# Altium PCB PCB1.PcbDoc
Units mm, origin at the board's own origin, x right, y up, seen from the top; angles counter-clockwise.
Board outline 40 x 49.4 mm, 2 copper layers (Top Layer, Bottom Layer); 14 components, 7 nets, 36 pads, 14 vias.
Unrouted connection lines stored in the file: 1.
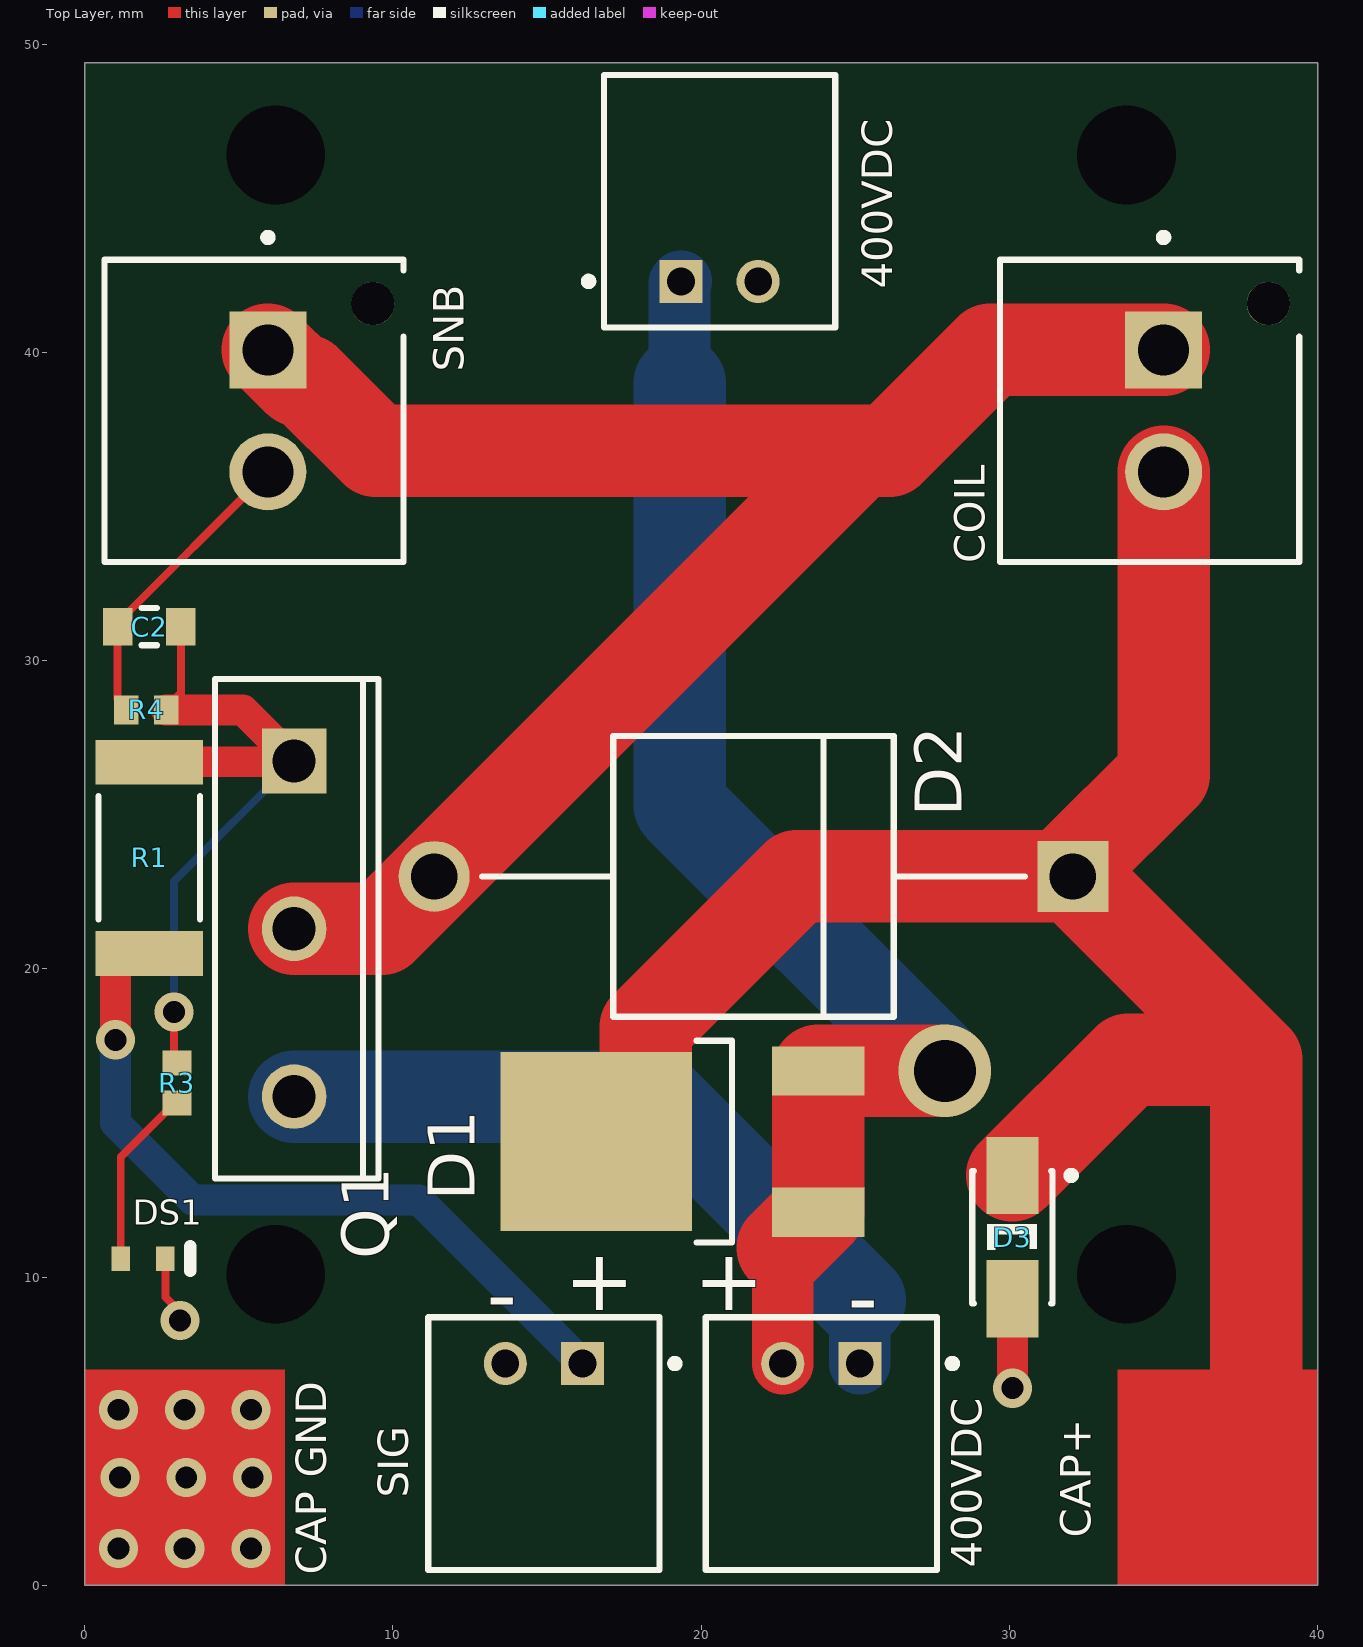
[diagram p0: Top Layer view]
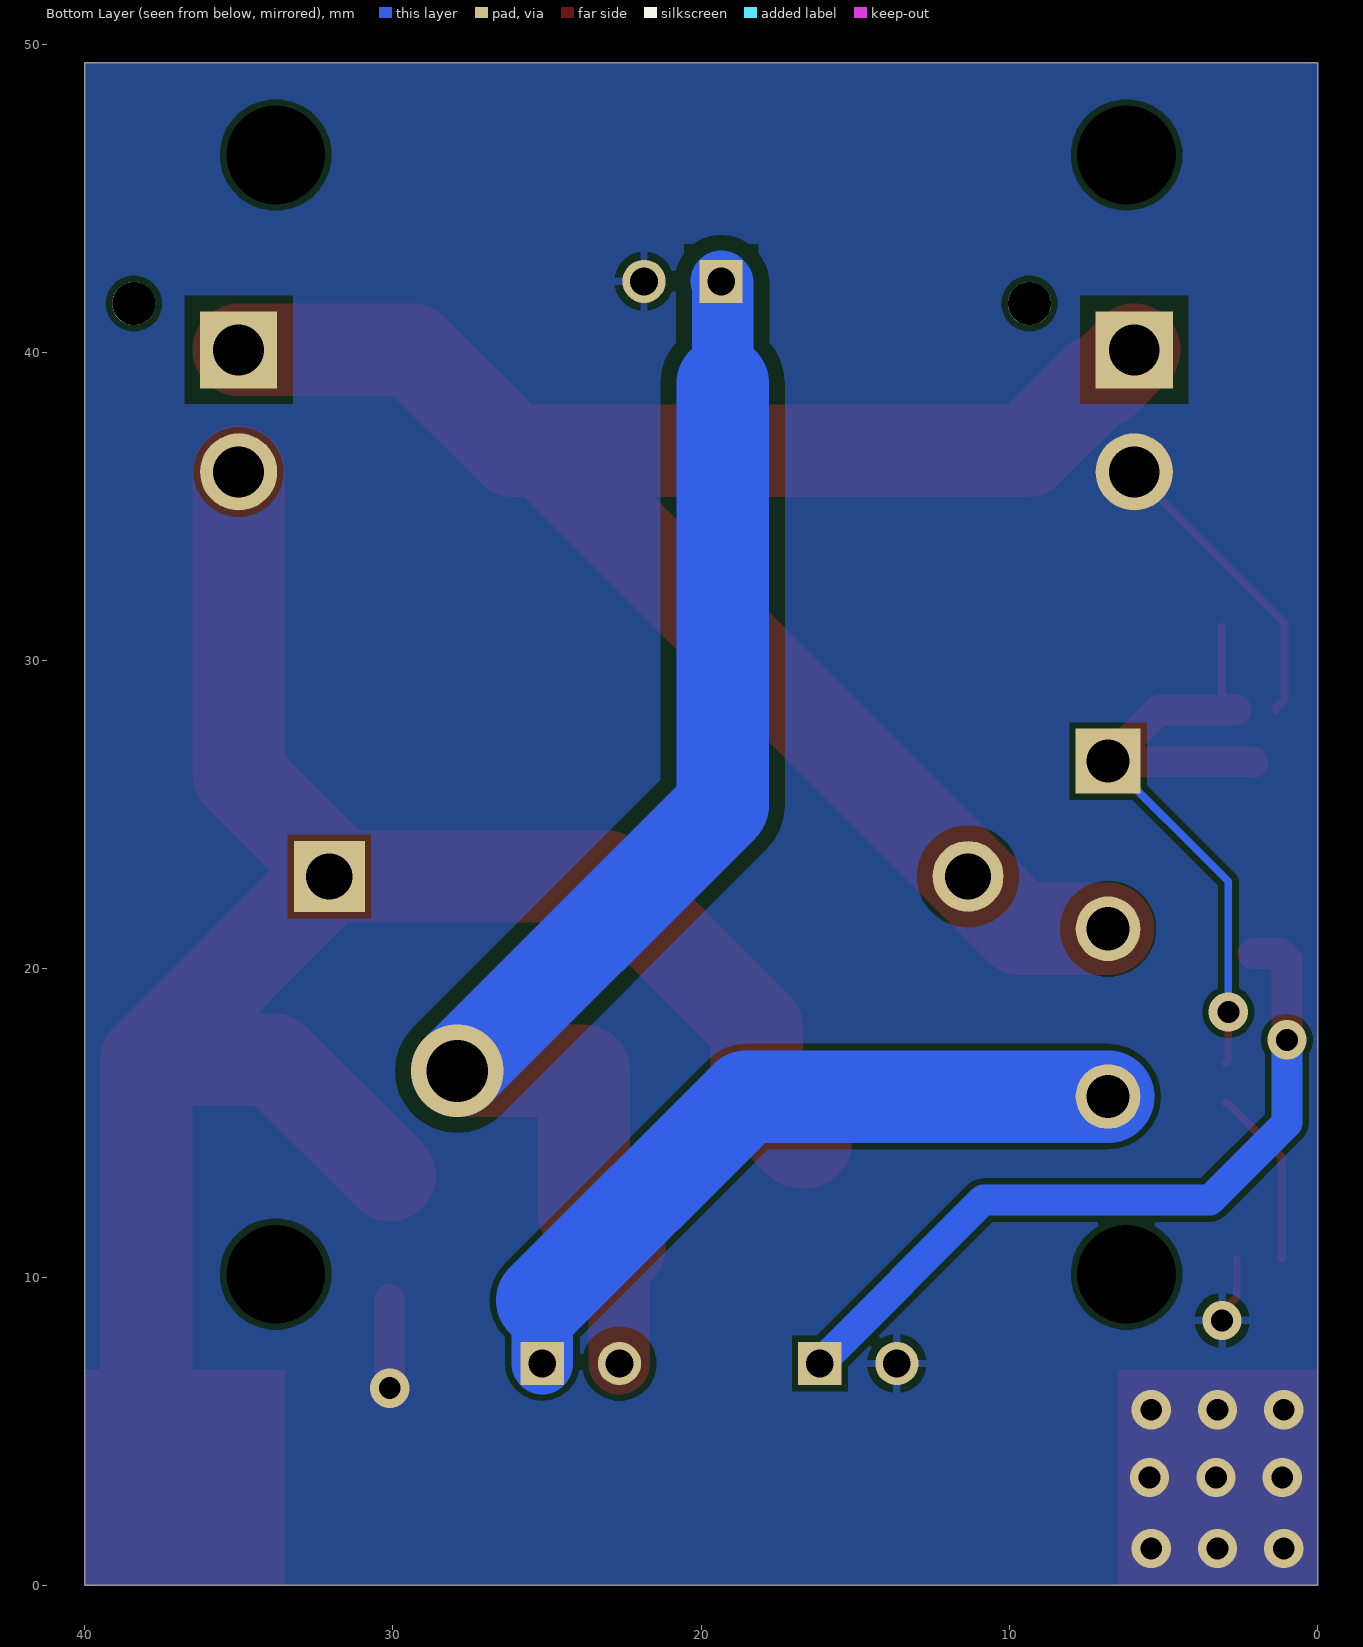
[diagram p1: Bottom Layer view, seen from below]
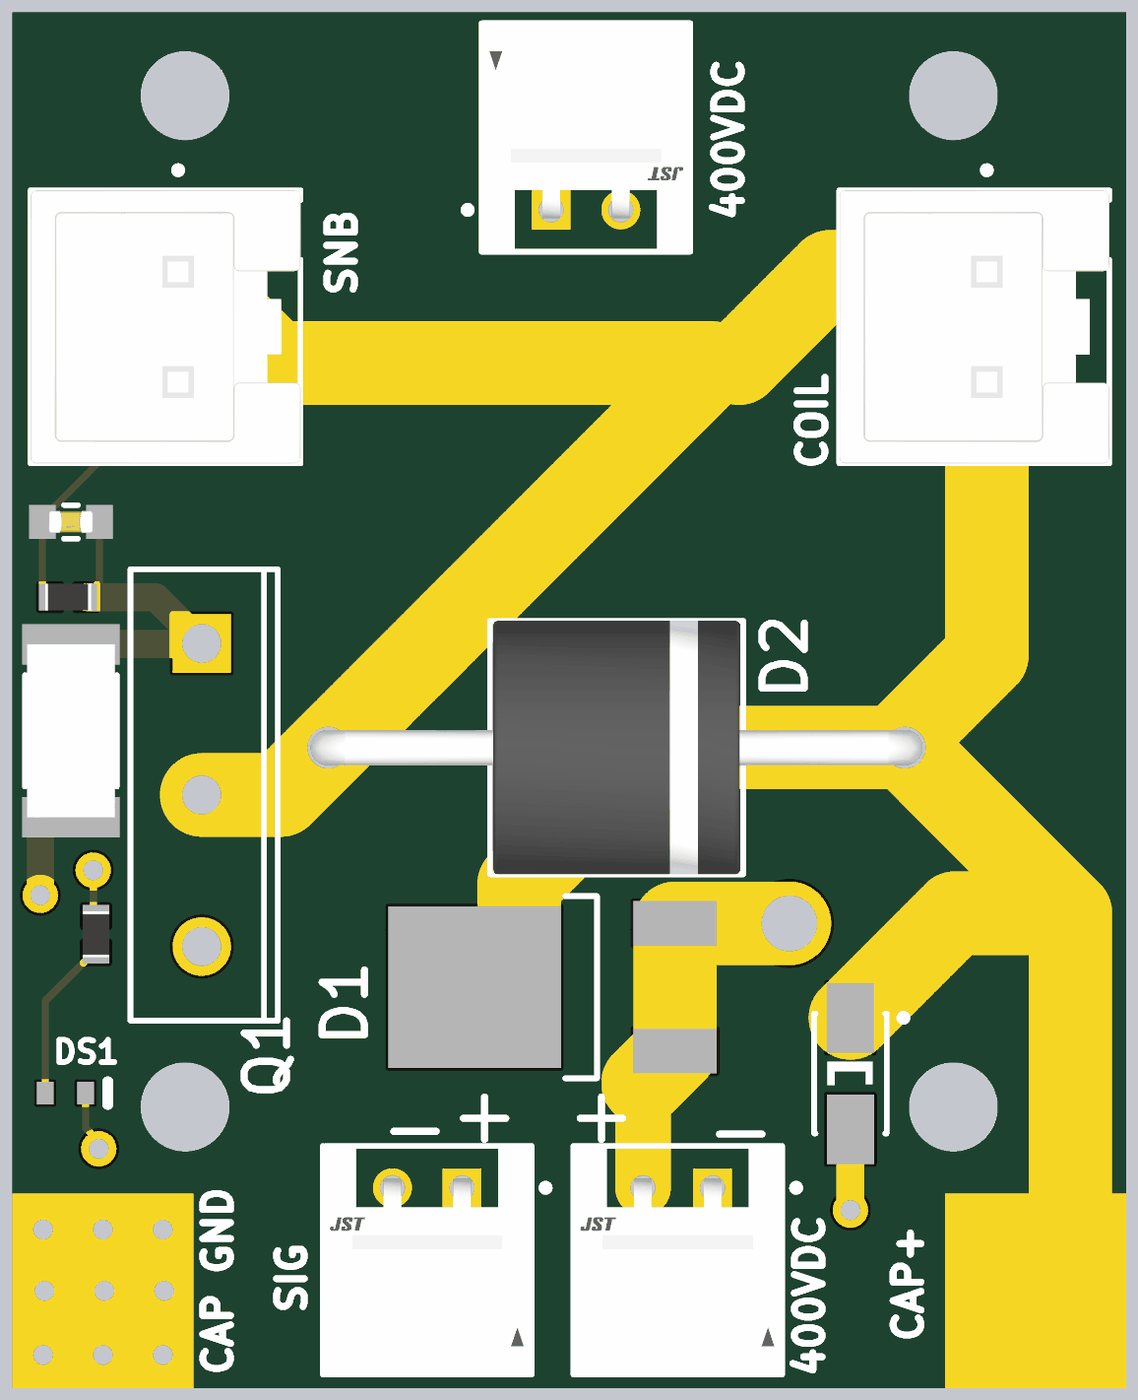
[diagram p2: 3D render of the assembled board from above, using the file's embedded part models]

## Layer stack, top to bottom
Top Solder: solder mask 0.0102, Solder Resist, Dk 3.5
Top Layer: signal copper 0.0356
Dielectric 1: dielectric 0.32, FR-4, Dk 4.8
Bottom Layer: signal copper 0.0356
Bottom Solder: solder mask 0.0102, Solder Resist, Dk 3.5

## Board outline
0,0 40,0 40,49.4 0,49.4

## Design rules (kind name [scope] priority, off if disabled: settings)
Clearance Clearance_1 [InNet('400VDC') or InNet('Collector1')] p1: gap=0.2 ignorepadtopadclearanceinfootprint=FALSE except(0: Arc-Hole Track-Hole SMDPad-Hole THPad-Hole Via-Hole Fill-Hole Poly-Hole Region-Hole Text-Hole; 0.5: Track-Poly THPad-Poly)
Clearance [All] p2: gap=0.2 ignorepadtopadclearanceinfootprint=FALSE except(0: Arc-Hole Track-Hole SMDPad-Hole THPad-Hole Via-Hole Fill-Hole Poly-Hole Region-Hole Text-Hole)
Height [All] p1: minheight=0 maxheight=100 prefheight=12.7
HoleSize [All] p1: absolutevalues=TRUE maxlimit=10 minlimit=0.025 maxpercent=80.000 minpercent=20.000
MinimumSolderMaskSliver [All] p1: minsoldermaskwidth=0.2
PlaneClearance [All] p1: clearance=1
PolygonConnect [All] p1: connectstyle=Relief reliefconductorwidth=0.254 reliefentries=4 polygonreliefangle="90 Angle" airgapwidth=0.254
RoutingVias [All] p1: holewidth=0.711 width=1.27 viastyle="Through Hole" minholewidth=0.711 minwidth=1.27 maxholewidth=0.711 maxwidth=1.27
SilkToSolderMaskClearance [IsPad] p1: minsilkscreentomaskgap=0.2 clearancetoexposedcopper=TRUE
SolderMaskExpansion [All] p1: expansion=0.102 istentingtop=FALSE
Width [All] p1: maxlimit=10 minlimit=0.254 preferedwidth=0.254 minimp=50.000000 maximp=50.000000 favimp=50.000000
25 further rules are at their usual default settings.

## Components (designator, comment, footprint, x,y, rotation, side; value= is the part's Value field where it differs from the comment)
400VDC "(D)S2B-EH (LF)(SN)" FP-D_S2B-EH_LF_SN-MFG 20.6,44.9 r0 top (schematic designator J5)
400VDC "(D)S2B-EH (LF)(SN)" FP-D_S2B-EH_LF_SN-MFG 23.9,4.6 r180 top (schematic designator J2)
C2 "CGA3E2X7R1H104K080AA" FP-CGA3E-0_3-0_1-IPC_A 2.1,31.1 r180 top
COIL "B2P-VH-FB-B(LF)(SN)" FP-B2P-VH-FB-B_LF_SN-MFG 34.55,38.1 r90 top (schematic designator J3)
D1 "MURHD560T4G" ONSC-DPAK-3-369C-01_V 19.4,14.4 r180 top
D2 "GI756-E3/54" FP-P600-MFG 21.7,23 r180 top
D3 "R" DIOD-S1M-13-F-SMA-2_V 30.1,11.3 r90 top
DS1 "Coil 3" VISH-TLMX1100_V 1.9,10.6 r0 top
Q1 "SCR" INF-PG-TO247-3-44_A 6.8,21.3 r0 top
R1 "1k" FP-CRCW2512-e3-MFG 2.1,23.6 r90 top
R3 "400" RESC1609X50X30NL8T20 3,16.3 r90 top
R4 "10k" RESC1609X50X30NL8T20 2,28.4 r0 top
SIG "(D)S2B-EH (LF)(SN)" FP-D_S2B-EH_LF_SN-MFG 14.9,4.6 r180 top (schematic designator J4)
SNB "B2P-VH-FB-B(LF)(SN)" FP-B2P-VH-FB-B_LF_SN-MFG 5.5,38.1 r90 top (schematic designator J1)

## Footprints (in the part's own frame and the unit in brackets; to place one, negate y for a bottom-side part, rotate by r counter-clockwise, add the part's x,y. Pads: shape width x height; smd on the part's side, far side on the other; paste and mask are expansions set on the pad)
DIOD-S1M-13-F-SMA-2_V [mm] "SMD, 2-Leads, Body 4.3x2.605mm, Height 2.3mm"
  rect 2.5x1.7 smd: 1(-2,0) 2(2,0)
  silkscreen extent -2.15,-2.03 2.15,1.3, body extent -2.15,-1.3 2.15,1.3, height 2.3
FP-B2P-VH-FB-B_LF_SN-MFG [mm]
  rect 2.5x2.5 hole 1.65 paste-2539.97 mask+0: 1(1.98,-0.45)
  round 2.5 hole 1.65 paste-2539.97 mask+0: 2(-1.98,-0.45)
  round 1.4 hole 1.4 unplated paste-2539.97 mask+0: ""(3.48,-3.85)
  silkscreen extent -4.9,-4.85 5.75,4.85, body extent -5,-4.95 5,4.95, height 0.25
FP-CGA3E-0_3-0_1-IPC_A [mm]
  rect 0.956x1.206 smd paste+0 mask+0: 1(-1.025,0) 2(1.025,0)
  silkscreen extent -0.25,-0.6 0.25,0.6, body extent -2,-1.1 2,1.1, height 0.25
FP-CRCW2512-e3-MFG [mm]
  rect 1.45x3.5 smd paste+0 mask+0: 1(-3.1,0) 2(3.1,0)
  silkscreen extent -2,-1.65 2,1.65, body extent -3.93,-1.85 3.93,1.85, height 0.25
FP-D_S2B-EH_LF_SN-MFG [mm]
  rect 1.4x1.4 hole 0.9 paste-2539.97 mask+0: 1(-1.25,-2.6)
  round 1.4 hole 0.9 paste-2539.97 mask+0: 2(1.25,-2.6)
  silkscreen extent -4.37,-4.1 3.75,4.1, body extent -3.85,-4.2 3.85,4.2, height 0.25
FP-P600-MFG [mm]
  rect 2.3x2.3 hole 1.5 paste-2539.97 mask+0: 1(-10.358,0)
  round 2.3 hole 1.5 paste-2539.97 mask+0: 2(10.358,0)
  silkscreen extent -8.81,-4.55 8.81,4.55, body extent -11.61,-4.65 11.61,4.65, height 0.25
INF-PG-TO247-3-44_A [mm] "FM, 3-Leads, Body 15.915x5.02mm, Pitch 5.44mm"
  rect 2.1x2.1 hole 1.4: 1(0,5.44)
  round 2.1 hole 1.4: 2(0,0) 3(0,-5.44)
  silkscreen extent -2.57,-8.1 2.74,8.1, body extent -2.54,-8.08 2.71,8.08, height 25.57
ONSC-DPAK-3-369C-01_V [mm] "DPAK, 3-Leads, Body 6.54x6.095mm, Pitch 2.29mm"
  rect 3x1.6 smd: 1(-4.4,2.29) 3(-4.4,-2.29)
  rect 6.2x5.8 smd: 4(2.8,0)
  silkscreen extent -1.6,-3.27 -0.45,3.27, body extent -1.6,-3.27 4.49,3.27, height 2.38
RESC1609X50X30NL8T20 [mm] "Chip Resistor, 2-Leads, Body 1.65x0.95mm, IPC Medium Density"
  rect 0.8x0.95 smd: 1(-0.65,0) 2(0.65,0)
  body extent -0.82,-0.48 0.82,0.48, height 0.5
VISH-TLMX1100_V [mm] "SMD, 2-Leads, Body 1.6x0.8mm"
  rect 0.6x0.8 smd: 1(-0.725,0) 2(0.725,0)
  silkscreen extent 1.53,-0.4 1.53,0.4, body extent -0.8,-0.4 0.8,0.4, height 0.65

## Part data
400VDC 400VDC SIG: library part CMP-17439-000238-1, "CONN HEADER R/A 2POS 2.5MM"
C2: library part CMP-2000-07546-2, "Cap Ceramic 100nF 50V X7R 10% Pad SMD 0603 +125°C Automotive T/R", Capacitance=100nF, Case Code (Imperial)=0603, Case Code (Metric)=1608, Dielectric=X7R, Max Operating Temperature=125°C, Min Operating Temperature=-55°C, Package Quantity=1, Ratings=AEC-Q200, Tolerance=10%, Voltage=50V, Case/Package=0603, Composition=Ceramic, Depth=0.8mm, Height=0.8mm, Lead Free="Lead Free", Length=1.6mm, Mount="Surface Mount", Packaging="Tape and Reel", Radiation Hardening=No, REACH SVHC="No SVHC", Termination=SMD/SMT, Thickness=0.035inch, Voltage Rating=50V, Voltage Rating (DC)=50V, Weight=7.1E-05oz, Width=0.8mm
COIL SNB: library part CMP-17439-000031-1, "CONN HEADER VERT 2POS 3.96MM", Color=Natural, Package Quantity=250, Connector Type="Male Pin", Contact Plating=Tin, Contact Type="Male Pin", Fastening Type=Ramp, Lead Free="Lead Free", Mount="Through Hole", Number of Positions=2, Number of Rows=1, Packaging=Bulk, Pitch=0.156inch, Series=VH, Termination=Solder
D1: library part CMP-0902-00243-1, "Power Rectifier, 3-Pin DPAK, Pb-Free, Tape and Reel", Manufacturer="On Semiconductor", ComponentLink1Description="Manufacturer URL", ComponentLink1URL=http://www.onsemi.com/, ComponentLink2Description=Datasheet, ComponentLink2URL=http://www.onsemi.cn/pub_link/Collateral/MURHD560-D.PDF, ComponentLink3Description="Package Specification", ComponentLink3URL=http://www.onsemi.cn/pub_link/Collateral/369C.PDF, DatasheetVersion="Rev. 8", IFSM Max (A)=50, Mounting Technology="Surface Mount", PackageDescription="3-Pin Flange Mount, Body 6.54 x 6.095 mm, Pitch 2.29 mm", PackageReference=DPAK-3-369C-01, PackageVersion="Rev. E, 02/2014", Packing="Tape and Reel", PartNumber=MURHD560T4G, RoHS=TRUE, Type=Ultrafast, VRRM Max (V)=600
D2: library part CMP-02540-000099-1, "DIODE GEN PURP 600V 6A P600", Average Rectified Current=6A, Capacitance=150pF, Case/Package=P, Current=400A, Forward Voltage=1.25V, Max Operating Temperature=150°C, Max Repetitive Reverse Voltage (Vrrm)=600V, Max Reverse Current=5uA, Min Operating Temperature=-50°C, Package Quantity=1, Voltage=1.2kV, Diameter=9.1mm, Diode Type=RECTIFIER, Element Configuration=Single, Forward Current=6A, Height=9.1mm, Lead Free="Lead Free", Length=0.358inch, Max Forward Surge Current (Ifsm)=400A, Max Reverse Voltage (DC)=600V, Max Surge Current=400A, Mount="Through Hole", Number of Pins=2, Output Current=6A, Packaging="Tape and Reel", Peak Non-Repetitive Surge Current=400A, Polarity=Standard, Radiation Hardening=No, Recovery Time=2500ns, Reverse Recovery Time=2500ns, Reverse Voltage=600V, RoHS Compliant=Yes, Width=9.1mm
D3: library part CMP-0639-00001-1, "Surface Mount Glass Passivated Rectifier, 1000V, 1 A, -65 to 125 degC, 2-Pin SMA Package, RoHS, Tape and Reel", Forward Voltage Drop VF (V)=1.1, Manufacturer="Diodes Inc", Maximum Average Rectified Current IO (A)=1, Maximum Peak Forward Surge Current IFSM (A)=30, Maximum Reverse Current IR (uA)=5, Operating Temperature Range="-65 to 150 degC", PartNumber=S1M-13-F, Peak Repetitive Reverse Voltage VRRM (V)=1000, Total Capacitance CT (pF)=10, ComponentLink1Description="Manufacturer URL", ComponentLink1URL=http://www.diodes.com/, ComponentLink2Description=Datasheet, ComponentLink2URL=http://diodes.com/datasheets/ds16003.pdf, ComponentLink3Description="Package Specification", ComponentLink3URL=http://diodes.com/datasheets/ds16003.pdf, DatasheetVersion="Rev. 22 - 2", Mounting Technology="Surface Mount", PackageDescription="2-Pin SMD, Body 4.3 x 2.605 mm, Height 2.3 mm", PackageReference=S1M-13-F-SMA-2, PackageVersion="Rev. 22 - 2", Packing="Tape and Reel", RoHS=TRUE
DS1: library part CMP-1666-00027-1, "LED, RED, 2.1 V, -40 to 100 degC, 2-Pin SMD (0603), RoHS, Tape and Reel", Capacitance="12 pF", Case Code (Imperial)=0603, Case Code (Metric)=1608, Max Operating Temperature=125degC, Min Operating Temperature=-55degC, Package Quantity=4000, Resistance="100000000000 Ohm", Tolerance=5%, Type (Capacitors)=C0G, Voltage Rating="50 V", Case/Package=0603, ComponentLink1Description="Manufacturer URL", ComponentLink1URL=http://www.vishay.com/, ComponentLink2Description=Datasheet, ComponentLink2URL=http://www.vishay.com/docs/83173/tlmb1100.pdf, DatasheetVersion="Rev. 2.7, 03/2016", Height="0.8 mm", Length="1.6 mm", Mount="Surface Mount", PackageDescription="2-Pin Surface Mount Device, Body 1.6 x 0.8 mm", PackageReference=TLMX1100, Packaging="Tape and Reel", Pins=2, Radiation Hardening=No, REACH SVHC="No SVHC", RoHSCompliant=True, Voltage Rating (DC)="50 V", Width="0.8 mm"
Q1: library part CMP-1168-00055-1, "High Speed IGBT in NPT-Technology, PG-TO247-3-44, Tube, Green", Manufacturer=Infineon, PartNumber=SGW30N60HS, Switching Frequency="HighSpeed 30-100 kHz", ComponentLink1Description="Manufacturer URL", ComponentLink1URL=http://www.infineon.com/, ComponentLink2Description=Datasheet, ComponentLink2URL=http://www.infineon.com/dgdl/SGP_W30N60HS_Rev2_4G.pdf?folderId=db3a304412b407950112b408e8c90004&fileId=db3a304412b407950112b427ac823c95, ComponentLink3Description="Package Specification", ComponentLink3URL=http://www.infineon.com/dgdl/IDW10S120_Rev+2.pdf?folderId=db3a304314dca38901151224afae0c96&fileId=db3a304336724dc40136789691a04aa5, DatasheetVersion="Rev. 2.4", Green=TRUE, Halogen-free=FALSE, IC(max) @ 25 degC="41 A", IC(max) @ 100 degC="30 A", Mounting Technology="Through Hole", PackageDescription="3-Pin Plastic (Green) Transistor Single Outline Package, Body 15.915 x 20.95 mm, Pitch 5.44 mm", PackageReference=PG-TO247-3-44_A, PackageVersion="Rev. 05, 07/2010", Packing=Tube, RevisionNote="Lost Devices pt2", VCE (max)="600 V", VCE(sat) (typ)="2.8 V"
R1: library part CMP-02407-004199-1, "RES Thick Film, 100kΩ, 1%, 1W, 100ppm/°C, 2512", Case Code (Imperial)=2512, Case Code (Metric)=6432, Max Operating Temperature=155°C, Max Power Dissipation=1W, Min Operating Temperature=-55°C, Package Quantity=2000, Resistance=100kR, Temperature Coefficient=100ppm/°C, Tolerance=1%, Voltage Rating=500V, Case/Package=2512, Composition="Thick Film", Contact Plating=Tin, Depth=3.15mm, Features="Automotive AEC-Q200", Height=0.6mm, Lead Free="Lead Free", Length=6.3mm, Military Standard=Not, Number of Pins=2, Number of Terminations=2, Packaging="Tape and Reel", Power Rating=1W, Radiation Hardening=No, Termination=SMD/SMT, Voltage Rating (DC)=500V, Weight=0.001429oz, Width=3.15mm
R3 R4: library part CMP-1666-00005-4, "Chip Resistor, 10 KOhm, +/- 1%, 100 mW, -55 to 155 degC, 0603 (1608 Metric), RoHS, Tape and Reel", Manufacturer="Vishay Semiconductor", Max Operating Temperature="155 degC", Min Operating Temperature="-55 degC", Package Quantity=5000, Voltage Rating="75 V", ComponentLink1Description="Manufacturer URL", ComponentLink1URL=http://www.vishay.com/, ComponentLink2Description=Datasheet, ComponentLink2URL=https://datasheet.ciiva.com/11809/0900766b80d98afc-11809037.pdf, DatasheetVersion=06/2012, Height="0.45 mm", Length="1.55 mm", Mounting Technology="Surface Mount", PackageDescription="2-Pin Surface Mount Device, Body 1.575 x 0.85 mm", PackageReference=0603, Packaging="Tape and Reel", REACH SVHC=Unknown, RoHSCompliant=true

## Free pads (board coordinates)
  round 1.524 hole 3.2 unplated: 30(6.2,10.1) 30(6.2,46.4) 30(33.8,46.4) 31(33.8,10.1)

## Via types
v1: diameter 1.27, hole 0.711, Top Layer to Bottom Layer, 13 vias
v2: diameter 3, hole 2, Top Layer to Bottom Layer, 1 vias

## Nets (pads, with @x,y where several pads share a name; then routed paths per layer and width w, separated by ;. In a path a pad name is that pad's centre, name@x,y a point inside that pad or via, vN(x,y) a via of type N, cw(c..) or ccw(c..) an arc to the next point about the centre after c; other vN are vias at no path point)
400VDC: 400VDC.1@19.35,42.3 400VDC.2@22.65,7.2 D1.1 D1.3 | length 44.2
  Top Layer w0.254: D1.1 D1.1@24.473,12.783
  Top Layer w2: 400VDC.2@22.65,7.2 22.65,10.96
  Top Layer w3: 22.65,10.96 D1.1 D1.3 v2(27.91,16.69)
  Bottom Layer w2: 19.3,39 19.3,42.25 400VDC.1@19.35,42.3
  Bottom Layer w3: 19.3,39 19.3,25.3 v2(27.91,16.69)
C1+: COIL.2 D1.4 D2.1 D3.2 | length 66.3
  Top Layer w3: D1.4 16.8,14.4 18.2,15.8 18.2,18.1 23.1,23 D2.1 ; D3.2 33.858,17.058 38,17.058 ; COIL.2 35,26.3 32.058,23.358 D2.1 ; 36.75,3.85 38,5.1 38,17.058 ; D2.1 38,17.058
Collector1: COIL.1 D2.2 Q1.2 SNB.1 | length 56.5
  Top Layer w3: SNB.1 6.96,39.07 7.172,39.07 9.442,36.8 25.142,36.8 ; Q1.2 9.642,21.3 D2.2 25.142,36.8 ; COIL.1 29.38,40.08 26.1,36.8 25.142,36.8
GND: 400VDC.1@25.15,7.2 400VDC.2@21.85,42.3 C2.2 D3.1 DS1.2 Q1.3 R4.1 SIG.2 SNB.2 | length 38.1
  Top Layer w0.254: R4.1 1.35,28.475 1.075,28.75 C2.2 1.075,31.225 5.95,36.1 SNB.2 ; DS1.2 2.625,9.35 3.1,8.875 v1(3.1,8.6)
  Top Layer w1: v1(30.1,6.4) D3.1
  Bottom Layer w2: 400VDC.1@25.15,7.2 25.15,9.25
  Bottom Layer w3: Q1.3 18.54,15.86 25.15,9.25
  other v1: 1.1,1.2 3.25,1.2 5.4,1.2 1.15,3.5 3.3,3.5 5.45,3.5 1.1,5.7 3.25,5.7 5.4,5.7
NetC2_1: C2.1 Q1.1 R1.2 R3.2 R4.2 | length 23.9
  Top Layer w0.254: R4.2 2.65,28.475 3.125,28.95 C2.1 ; v1(2.9,18.6) 2.9,17.05 R3.2
  Top Layer w1: R1.2 2.12,26.72 6.78,26.72 Q1.1 5.14,28.4 R4.2
  Bottom Layer w0.254: v1(2.9,18.6) 2.9,22.84 Q1.1
NetDS1_1: DS1.1 R3.1 | length 5.8
  Top Layer w0.254: DS1.1 1.175,13.9 2.925,15.65 R3.1
Sig1: R1.1 SIG.1 | length 24.8
  Top Layer w1: v1(1,17.7) 1,20.275 1.225,20.5 R1.1
  Bottom Layer w1: v1(1,17.7) 1,15 3.5,12.5 10.85,12.5 SIG.1
pads on no net: COIL. SNB.

## Polygon pours and split planes (outlines as drawn)
GND on Bottom Layer "GND_L02_P000" (solid, pour order 0): 0,0 40,0 40,49.4 0,49.4

## Other copper
Top Layer:
  rectangle net GND: 0,0 6.5,7
  rectangle net C1+: 33.5,0 40,7

## Silkscreen, mask and mechanical layers (free items; w line width, h text height)
Top Overlay:
  text "+" at 15.554,8.921 h2
  text "+" at 19.754,8.921 h2
  text "-" at 13.054,8.454 h2
  text "-" at 24.754,8.354 h2
  text "CAP+" at 32.646,1.554 h1 r90
  text "CAP GND" at 7.846,0.354 h1 r90
Top Solder:
  rectangle: 0,0 6.5,7
  rectangle: 33.5,0 40,7